# EAGLE board plugV11-to-pcbway-3 (EAGLE 7.5.0)
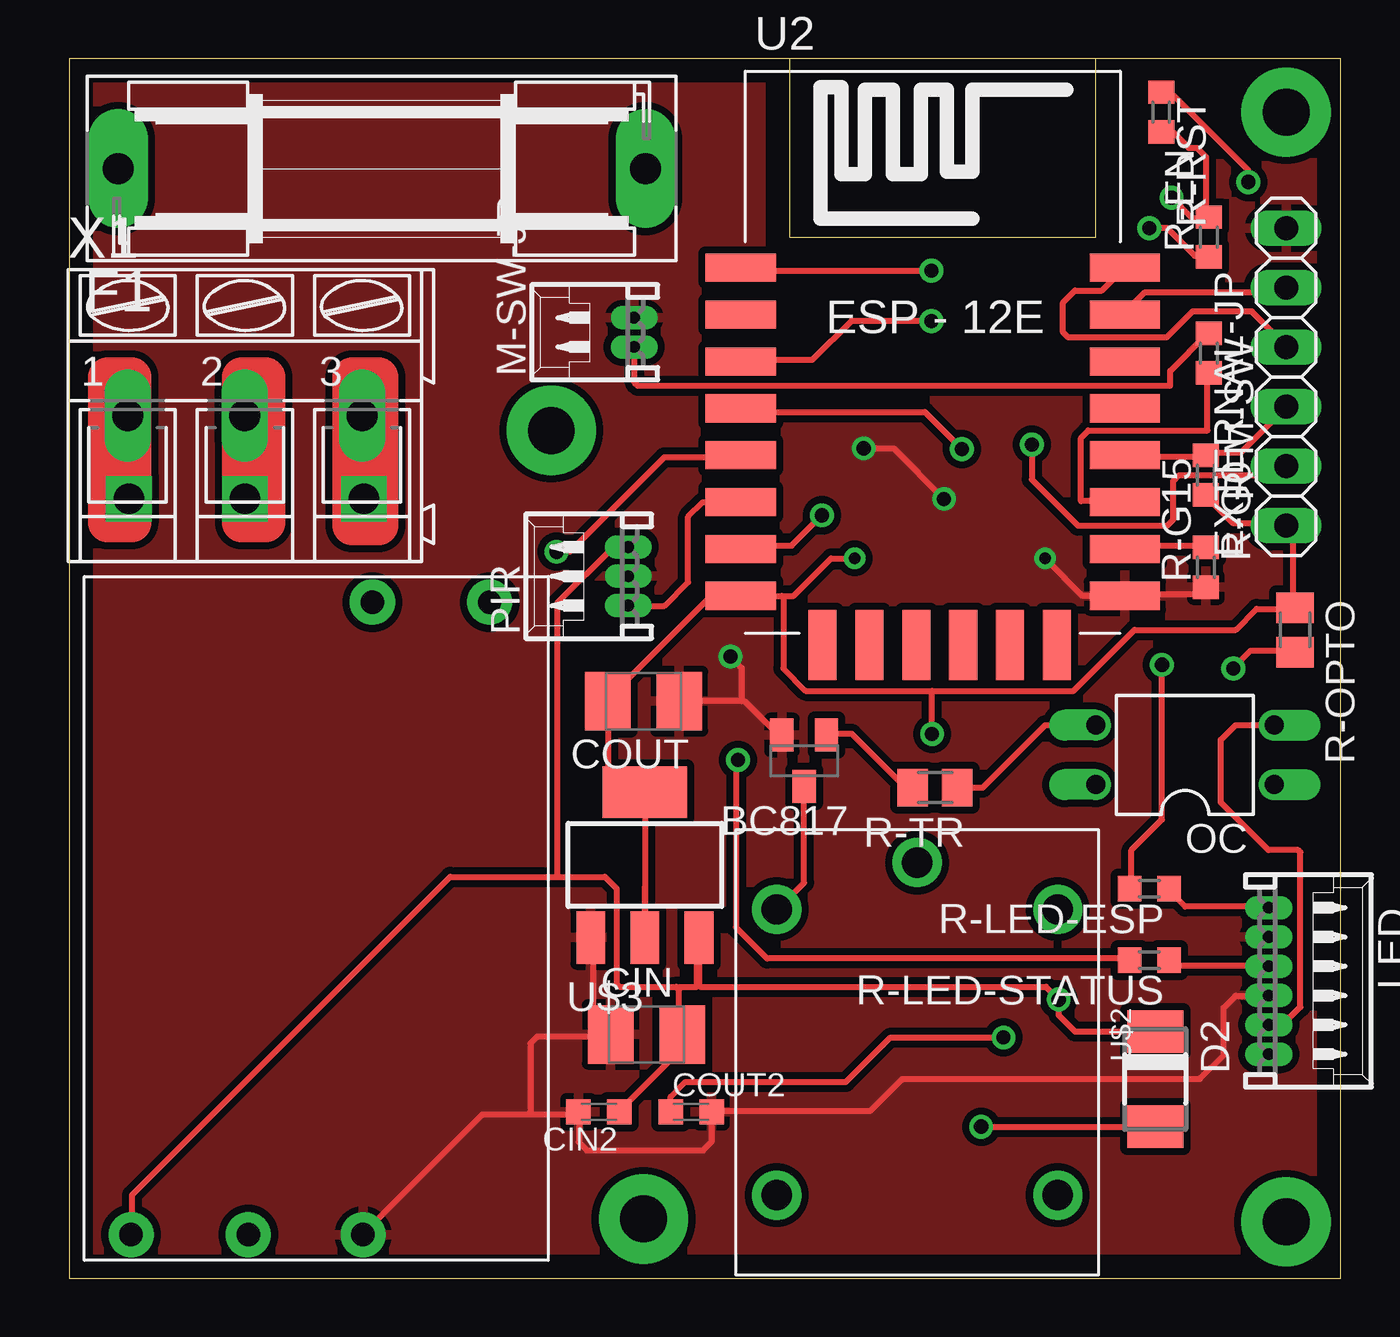
[diagram p0: board, top side]
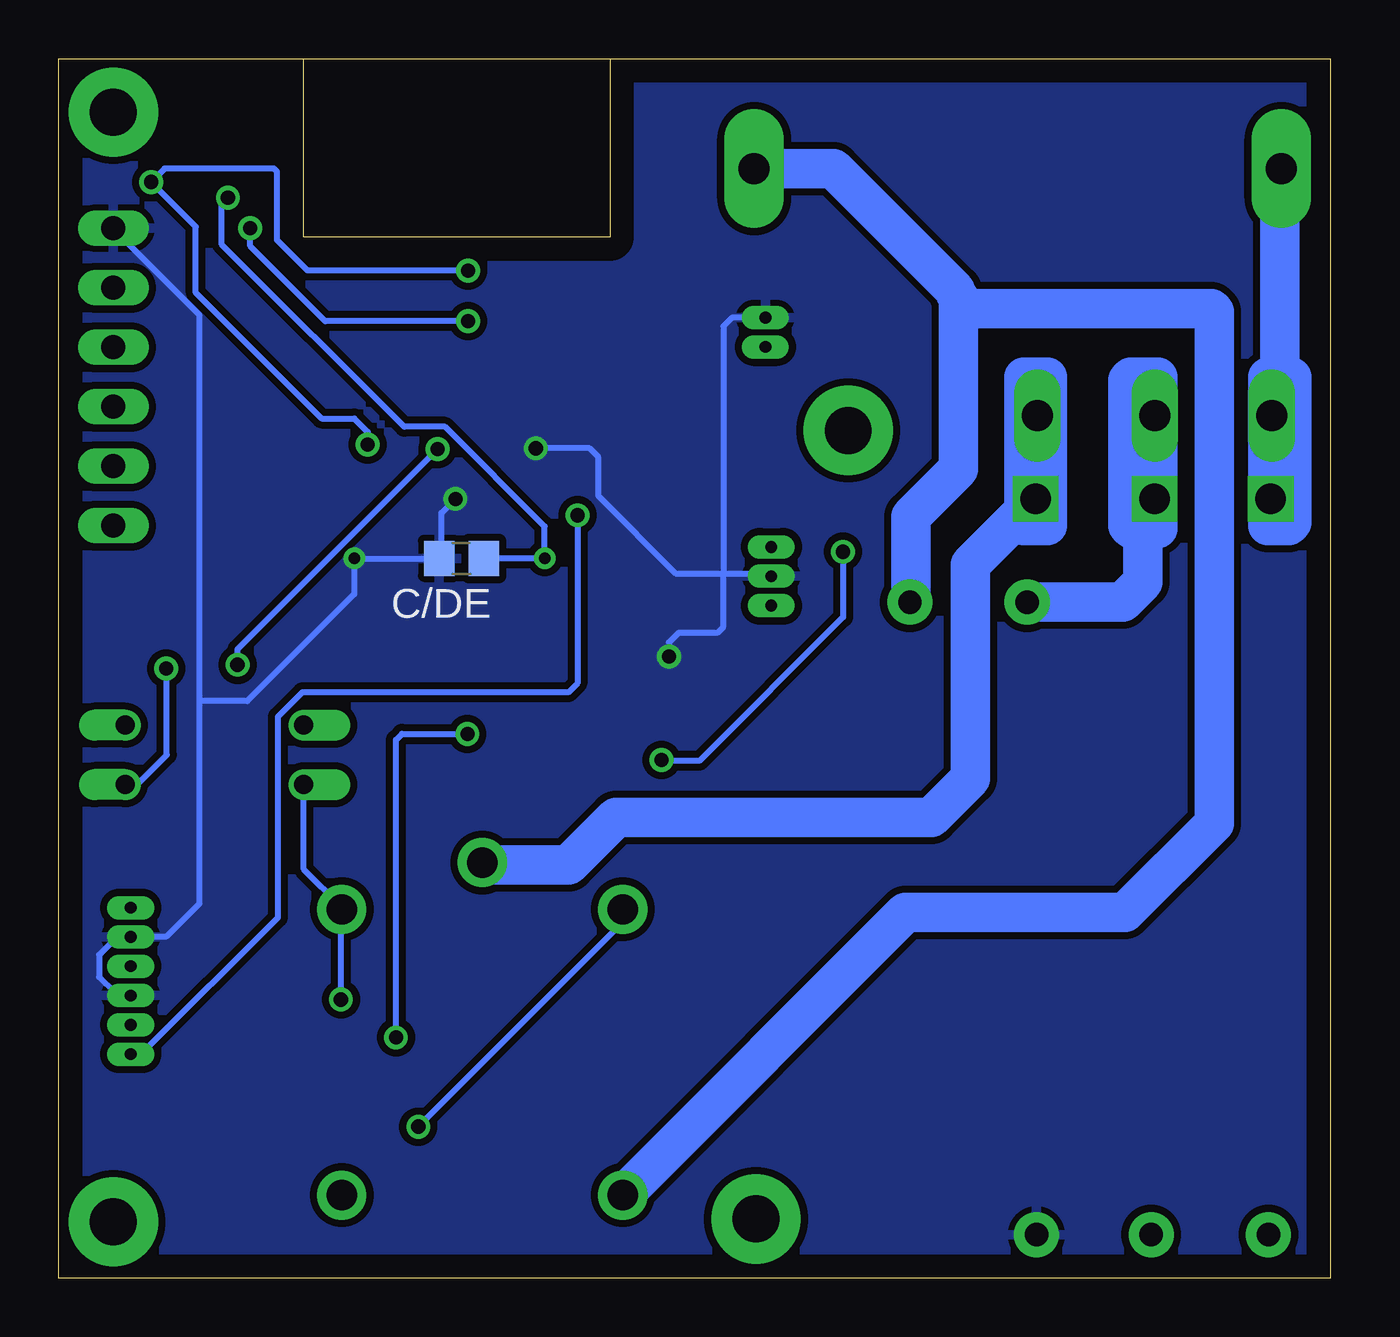
[diagram p1: board, bottom side, seen from below]

Size 54.28 x 52.07 mm. Coordinates in mm from the lower left corner, seen from the top.
Outline: 0,0 54.28,0 54.28,52.06 0,52.06 0,0
Outline: 30.73,52.07 30.73,44.45 43.81,44.45 43.81,52.07 30.73,52.07
Copper layers (1*16): Top 0.035mm / dielectric 1.5mm / Bottom 0.035mm
Design rules "default": minimum track width 10mil, minimum drill 24mil, track to track 8mil, track to pad 8mil, pad to pad 8mil, via to via 8mil, smd to smd 8mil, copper to edge 40mil, drill to drill 8mil, minimum pad ring 10mil, minimum via ring 8mil, stop-mask expansion 4mil, vias tented up to drill 0mil, thermal gap 10mil

## Footprints (pad centres in the part's own frame; a part is rotated, then mirrored left to right if it is on the bottom)
SOT23-BEC = smd 1 x 1.4: B -0.95,-1.1; C 0,1.1; E 0.95,-1.1
C0805 = smd 1.3 x 1.5: 1 -0.95,0; 2 0.95,0
B/3528-21R = smd 1.95 x 2.5: + 1.525,0; - -1.525,0
C0603K = smd 1.05 x 1.08: 1 -0.875,0; 2 0.875,0
DO-214AC = smd 1.8 x 2.4: A 2.025,0; C -2.025,0
1X06 = drill 1.016 long: 1 -6.35,0; 2 -3.81,0; 3 -1.27,0; 4 1.27,0; 5 3.81,0; 6 6.35,0
SH22,5 = drill 1.321 pad 2.54 long: 1 -11.252,0; 2 11.252,0
53048-06 = drill 0.5 pad 0.698 long: 1 3.125,-1.25; 2 1.875,-1.25; 3 0.625,-1.25; 4 -0.625,-1.25; 5 -1.875,-1.25; 6 -3.125,-1.25
53048-02 = drill 0.5 pad 0.698 long: 1 0.625,-1.25; 2 -0.625,-1.25
DIL04 = drill 0.813 offset: 1 -1.27,-3.81; 2 1.27,-3.81; 3 1.27,3.81; 4 -1.27,3.81
53048-03 = drill 0.5 pad 0.698 long: 1 1.25,-1.25; 2 0,-1.25; 3 -1.25,-1.25
R0603 = smd 1 x 1.1: 1 -0.85,0; 2 0.85,0
M0805 = smd 1.3 x 1.6: 1 -0.95,0; 2 0.95,0
ESP12E-SMD = smd 3 x 1.2: ADC -8.3,3.8; CH_PD -8.3,1.8; GND 8.1,-8.2; GPIO0 8.1,-2.2; GPIO2 8.1,-4.2; GPIO4 8.1,-0.2; GPIO5 8.1,1.8; GPIO12 -8.3,-4.2; GPIO13 -8.3,-6.2; GPIO14 -8.3,-2.2; GPIO15 8.1,-6.2; GPIO16 -8.3,-0.2; RESET -8.3,5.8; RXD0 8.1,3.8; TXD0 8.1,5.8; VCC -8.3,-8.2 | smd 1.2 x 3: CS0 -4.8,-10.3; GPIO9 -0.8,-10.3; GPIO10 1.2,-10.3; MISO -2.8,-10.3; MOSI 3.2,-10.3; SCLK 5.2,-10.3
RELAY-SONGLE = drill 1.3 pad 2.1: COM -8.1,0; NC 6.1,6; NO 6.1,-6; V+ -6.1,6; V- -6.1,-6
SOT-223 = smd 1.219 x 2.235: 1 -2.381,-3.099; 2 -0.07,-3.099; 3 2.241,-3.099 | smd 3.6 x 2.2: 4 -0.07,3.099
POWERSUPPLY-5V-700MA = drill 1 pad 1.93: 5V 13.5,-7.9; AC1 -13.5,7.4; AC2 -13.5,2.4; GND 13.5,2; NONE 13.5,-2.9
AK300/3 = drill 1.321 long: 1 -5.004,0; 2 0,0; 3 5.004,0

## Placement (x,y rotation side)
BC817  [SOT23-BEC]  31.37,22.1 180 top
C/DE  0.1uF  [C0805]  37.08,30.73 180 bottom
CIN  22uF/Tan  [B/3528-21R]  24.64,10.41 0 top
CIN2  0.1uF/ce  [C0603K]  22.61,7.11 180 top
COUT  22uF/Tan  [B/3528-21R]  24.51,24.64 180 top
COUT2  0.1uF/ce  [C0603K]  26.54,7.11 0 top
D2  [DO-214AC]  46.35,8.51 270 top
EXTERNAL-JP  Programming  [1X06]  51.94,38.48 90 top
F1  FUSESH22,5  [SH22,5]  13.34,47.37 0 top
LED  53048-06  [53048-06]  52.45,12.7 270 top
M-SW-JP  53048-02  [53048-02]  22.86,40.39 90 top
OC  PC817  [DIL04]  47.62,22.35 90 top
PIR  53048-03  [53048-03]  22.61,29.97 90 top
R-EN  10k  [R0603]  48.64,44.45 90 top
R-G0  10k  [R0603]  48.51,34.29 270 top
R-G15  1k  [R0603]  48.51,30.35 90 top
R-LED-ESP  470  [R0603]  46.1,16.64 180 top
R-LED-STATUS  470  [R0603]  46.1,13.59 180 top
R-M-SW  470  [R0603]  48.64,39.5 270 top
R-OPTO  1k  [M0805]  52.32,27.69 270 top
R-RST  10k  [R0603]  46.61,49.78 270 top
R-TR  510  [M0805]  36.96,20.95 180 top
U2  [ESP12E-SMD]  36.96,37.34 0 top
U$2  RELAY-SONGLE  [RELAY-SONGLE]  36.2,9.65 270 top
U$3  AMS1117-3.3  [SOT-223]  24.64,17.65 0 top
U$4  POWERSUPPLY-5V-700MA  [POWERSUPPLY-5V-700MA]  10.54,15.37 270 top
X1  [AK300/3]  7.49,36.83 0 top

## Library data of the parts
BC817 = transistor-neu-to92
C/DE CIN CIN2 COUT COUT2 R-EN R-G0 R-G15 R-LED-ESP R-LED-STATUS R-M-SW R-OPTO R-RST R-TR = rcl
D2 = diode
EXTERNAL-JP = pinhead
F1 = fuse; OC_FARNELL: unknown; OC_NEWARK: unknown
LED = con-molex; MF: WALDOM/MOLEX; MPN: 53048-0610; OC_FARNELL: 1012260; OC_NEWARK: 38C9911
M-SW-JP = con-molex; MF: MOLEX; MPN: 53048-0210; OC_FARNELL: 1012259; OC_NEWARK: 57H4718
OC = optocoupler; MPN: PC817X4J000F; OC_FARNELL: 9707727; OC_NEWARK: 97K7059
PIR = con-molex; MF: WALDOM/MOLEX; MPN: 53048-0310; OC_FARNELL: 9732918; OC_NEWARK: 38C9908
U2 = esp8266modules
U$2 = Seeed-OPL-Relay
U$3 = AMS1117-3.3
U$4 = PowerSupply-5V-700mA
X1 = con-ptr500; OC_FARNELL: unknown; OC_NEWARK: unknown

## Nets
3V3: C/DE.1 COUT2.1 COUT.+ EXTERNAL-JP.1 R-EN.2 R-G0.2 R-OPTO.1 R-RST.2 U2.VCC U$3.2 U$3.4
+5V: CIN2.1 CIN.+ D2.C OC.4 PIR.1 U$2.V+ U$3.3 U$4.5V
COM: U$2.COM X1.3
EN: R-EN.1 U2.CH_PD
G-00: EXTERNAL-JP.3 R-G0.1 U2.GPIO0
G-12: PIR.3 U2.GPIO12
G-13: LED.1 U2.GPIO13
G-15: R-G15.2 U2.GPIO15
GND: BC817.E C/DE.2 CIN2.2 CIN.- COUT2.2 COUT.- EXTERNAL-JP.6 LED.3 LED.5 M-SW-JP.1 PIR.2 R-G15.1 U2.GND U$3.1 U$4.GND
LED-ESP+: LED.6 R-LED-ESP.1
LED-RELAY+: LED.2 OC.2
LED-STATUS+: LED.4 R-LED-STATUS.1
LINE: F1.1 X1.1
M-SW+: M-SW-JP.2 R-M-SW.1
N: U$4.AC2 X1.2
N$1: OC.3 R-TR.1
N$2: BC817.B R-TR.2
N$4: R-LED-ESP.2 U2.GPIO16
N$7: R-M-SW.2 U2.GPIO2
N$8: R-LED-STATUS.2 U2.GPIO14
N$13: OC.1 R-OPTO.2
N$18: BC817.C D2.A U$2.V-
RELAY-NO: F1.2 U$2.NO U$4.AC1
RST: EXTERNAL-JP.2 R-RST.1 U2.RESET
RX: EXTERNAL-JP.5 U2.RXD0
TX: EXTERNAL-JP.4 U2.TXD0

## Tracks (layer width: path | path; a pad name or v marks a point on that pad's centre or on a via)
3V3  (via drill 0.5, 0.6, 0.61)
  Top 0.254: 30.41,29.14 U2.VCC 28.57,29.05 27.3,29.05 23.02,24.77 COUT.+ 23.02,24.61 23.02,20.8 24.45,20.8 U$3.4 24.61,20.64 24.61,14.61 U$3.2 24.57,16.69 | R-G0.2 48.58,33.34 49.69,32.23 51.91,32.23 EXTERNAL-JP.1 52.07,32.07 52.23,32.07 52.23,28.73 R-OPTO.1 | 48.58,45.4 R-EN.2 | R-RST.2 47.15,48.9 47.78,48.26 48.13,48.26 48.51,47.88 48.51,45.43 R-EN.2 | R-EN.2 48.58,45.24 47.94,45.24 v47.05,46.13 | 36.83,25.08 31.43,25.08 30.48,26.04 30.48,29.05 30.41,29.14 | 36.83,25.08 42.86,25.08 45.47,27.69 49.78,27.69 50.67,28.57 52.26,28.57 R-OPTO.1 | 52.23,28.57 R-OPTO.1 | 30.41,29.14 30.92,29.14 32.51,30.73 v33.53,30.73 | COUT2.1 25.67,7.76 26.29,8.38 33.15,8.38 35.05,10.29 v39.88,10.29 | v36.83,23.24 36.83,25.08
  Bottom 0.254: C/DE.1 v33.53,30.73 33.53,32.1 37.78,36.35 39.53,36.35 47.31,44.13 47.31,45.88 v47.05,46.13 | v39.88,10.29 39.88,22.99 39.62,23.24 v36.83,23.24
+5V  (via drill 0.61)
  Top 0.254: CIN2.1 23.5,7.14 26.04,9.68 26.04,10.32 CIN.+ 26.04,10.48 26.04,12.32 25.91,12.45 | 26.83,14.45 U$3.3 | 46.35,10.64 D2.C 46.35,10.54 42.93,10.54 42.23,11.24 v42.23,11.91 41.69,12.45 26.92,12.45 26.88,12.49 U$3.3 | 20.83,17.14 16.26,17.14 2.67,3.56 2.67,1.89 U$4.5V | 20.83,17.14 22.86,17.14 23.37,16.64 23.37,12.57 23.5,12.45 25.91,12.45 | 25.91,12.45 26.8,12.45 26.8,14.47 U$3.3 | PIR.1 23.22,31.22 20.83,28.83 20.83,17.14
  Bottom 0.254: OC.4 43.81,17.46 42.23,15.88 U$2.V+ 42.23,15.72 v42.23,11.91
COM  (via drill 1.3)
  Bottom 1.676: X1.3 12.5,38.43 12.45,38.48 | 12.45,38.48 12.32,38.48 | 12.32,38.48 12.06,38.48 12.06,32.13 13.08,32.13 13.08,38.48 12.45,38.48 | 12.32,38.48 12.32,33.53 v12.57,33.27 15.37,30.48 15.37,21.34 17.02,19.68 30.48,19.68 32.51,17.65 36.1,17.65 U$2.COM
EN  (via drill 0.61)
  Top 0.254: R-EN.1 48.58,43.66 48.04,43.66 46.86,44.83 v46.1,44.83 | U2.CH_PD 28.73,39.21 31.72,39.21 33.4,40.89 36.77,40.89 v36.8,40.86
  Bottom 0.254: v36.8,40.86 42.89,40.86 46.1,44.07 v46.1,44.83
G-00
  Top 0.254: U2.GPIO0 45.09,35.08 48.42,35.08 R-G0.1 48.58,35.24 50.01,35.24 51.91,37.15 EXTERNAL-JP.3
G-12
  Top 0.254: 28.57,33.02 U2.GPIO12 27.04,33.14 26.42,32.51 26.42,29.72 25.4,28.7 23.88,28.7 PIR.3
G-13  (via drill 0.61)
  Top 0.254: U2.GPIO13 28.73,31.27 30.83,31.27 v32.13,32.58
  Bottom 0.254: LED.1 51.12,9.68 50.64,9.68 44.93,15.4 44.93,23.97 43.88,25.02 32.51,25.02 32.13,25.4 v32.13,32.58
G-15
  Top 0.254: R-G15.2 48.42,31.27 45.09,31.27 U2.GPIO15
GND  (via drill 0.5, 0.6, 0.61)
  Top 0.254: 22.38,10.32 23.02,10.32 CIN.- 22.38,10.32 | 21.75,7.14 CIN2.2 | 27.3,6.99 COUT2.2 | CIN2.2 21.75,6.99 21.75,5.81 22.1,5.46 27.05,5.46 27.43,5.84 27.43,7.1 COUT2.2 | 22.38,10.32 22.38,14.45 U$3.1 | 19.56,6.99 21.59,6.99 CIN2.2 | 19.56,6.99 17.62,6.99 12.54,1.91 U$4.GND | 26.19,24.61 COUT.- | R-G15.1 48.42,29.37 48.26,29.21 45.09,29.21 U2.GND 43.25,29.14 v41.66,30.73 | COUT.- 26.19,24.77 26.45,24.77 | COUT2.2 27.46,7.14 34.2,7.14 35.56,8.51 48.26,8.51 49.28,9.53 49.28,11.56 49.78,12.06 51.12,12.06 LED.3 | BC817.E 30.27,23.2 28.83,24.64 28.7,24.64 | 28.7,24.64 COUT.- | 22.38,10.32 19.97,10.32 19.68,10.03 19.68,7.11 19.56,6.99 | v33.91,35.43 35.18,35.43 v37.34,33.27 | v28.23,26.54 28.7,26.07 28.7,24.64
  Bottom 0.254: 51.91,14.45 51.92,14.43 | 51.92,14.43 52.55,13.81 52.55,12.86 51.91,12.22 51.28,12.22 LED.3 | 25.91,30.1 23.97,30.1 PIR.2 | 48.26,24.64 48.26,16 49.66,14.61 51.17,14.61 LED.5 51.21,14.4 51.89,14.4 51.92,14.43 | 48.26,24.64 48.26,41.12 51.91,44.77 EXTERNAL-JP.6 | v37.34,33.27 37.94,32.67 37.94,30.64 C/DE.2 v41.66,30.73 41.66,29.21 46.23,24.64 48.26,24.64 | 25.91,30.1 27.94,30.1 31.24,33.4 31.24,35.05 31.62,35.43 v33.91,35.43 33.53,35.43 | 25.91,30.1 25.91,27.81 26.16,27.56 27.81,27.56 28.23,27.15 v28.23,26.54 | M-SW-JP.1 25.54,41.01 25.91,40.64 25.91,30.1
  pour Top (isolate 0.305): 0,0 54.23,0 54.23,52.07 0,52.07
  pour Bottom (isolate 0.305): 0,0 54.23,0 54.23,52.07 43.81,52.07 43.81,44.45 30.73,44.45 30.73,51.94 0,51.94
LED-ESP+
  Top 0.254: R-LED-ESP.1 46.99,16.51 47.62,15.88 51.12,15.88 LED.6
LED-RELAY+
  Top 0.254: LED.2 51.28,10.95 51.44,11.11 52.07,11.11 52.55,11.59 52.55,18.19 52.45,18.29 51.18,18.29 49.15,20.32 49.15,22.99 49.78,23.62 OC.2
LED-STATUS+
  Top 0.254: R-LED-STATUS.1 46.99,13.49 47.15,13.34 51.12,13.34 LED.4
LINE
  Bottom 1.676: X1.1 2.67,36.83 | 2.67,36.83 2.67,35.56 | 2.67,35.56 2.67,32.13 1.78,32.13 1.65,32.26 1.65,38.48 2.67,38.48 2.67,36.83 | 2.67,35.56 2.03,35.56 2.16,35.69 2.16,45.72 2.08,45.8 F1.1
M-SW+
  Top 0.254: R-M-SW.1 48.58,40.32 46.99,38.73 46.99,38.1 24.26,38.1 24.13,38.23 24.13,39.74 M-SW-JP.2 24.13,39.69
N
  Top 1.676: X1.2 7.37,36.83 | 7.37,36.83 7.37,38.48 8,38.48 | 8,38.48 8.38,38.48 8.38,32.26 8,32.26 | 8,32.26 7.37,32.26 7.37,36.83 | 8,38.48 8,32.26
  Bottom 1.676: X1.2 7.37,36.83 | 7.37,36.83 7.37,36.96 | 7.37,36.96 7.37,38.48 8.51,38.48 8.64,38.35 8.64,32.13 8.51,32 7.37,32 7.37,36.83 | 7.37,36.96 8.13,36.96 8,36.83 8,29.72 8.85,28.87 U$4.AC2
N$1
  Top 0.254: R-TR.1 38.99,20.95 41.66,23.62 OC.3
N$2
  Top 0.254: R-TR.2 35.69,20.95 33.4,23.24 32.36,23.24 BC817.B
N$3  (via drill 2 pad 3.81)
  other vias: 20.57,36.2
N$4  (via drill 0.61)
  Top 0.254: v38.1,35.4 36.51,36.99 28.73,36.99 U2.GPIO16 | R-LED-ESP.2 45.4,16.67 45.34,16.73 45.34,18.29 46.64,19.59 v46.64,26.19
  Bottom 0.254: v38.1,35.4 46.64,26.86 v46.64,26.19
N$5  (via drill 2 pad 3.81)
  other vias: 24.51,2.54
N$6  (via drill 2 pad 3.81)
  other vias: 51.94,2.41
N$7
  Top 0.254: R-M-SW.2 48.58,38.58 48.58,36.2 43.5,36.2 43.18,35.88 43.18,33.18 44.93,33.18 U2.GPIO2
N$8  (via drill 0.61)
  Top 0.254: R-LED-STATUS.2 45.24,13.65 29.78,13.65 28.45,14.99 28.45,22.04 v28.54,22.13 | 28.57,35.08 U2.GPIO14 28.57,35.05 25.4,35.05 21.37,31.02 v20.8,31.02
  Bottom 0.254: v20.8,31.02 20.8,28.23 26.92,22.1 28.51,22.1 v28.54,22.13
N$9  (via drill 2 pad 3.81)
  other vias: 51.94,49.78
N$10  (via drill 1.3)
  other vias: 7.49,33.27
N$12  (via drill 1.3)
  other vias: 2.54,33.27
N$13  (via drill 0.61)
  Top 0.254: 52.23,26.67 R-OPTO.2 52.26,26.8 50.42,26.8 49.69,26.07 v49.69,26.04
  Bottom 0.254: v49.69,26.04 49.66,26 49.66,22.35 50.9,21.11 51.44,21.11 OC.1 51.44,21.03
N$14
  Top 1.676: 2.41,38.48 2.67,38.48 2.67,32.26 1.65,32.26 1.65,38.48 2.41,38.48
N$15
  Top 1.676: 12.57,38.1 12.06,38.1 | 12.06,38.1 12.06,37.59 12.06,32.13 13.21,32.13 13.21,38.48 12.06,38.48 12.06,38.1
N$18  (via drill 0.61)
  Top 0.254: 46.35,6.51 D2.A v38.92,6.48 | U$2.V- 30.23,15.75 31.37,16.89 BC817.C
  Bottom 0.254: U$2.V- 30.32,15.72 30.32,15.08 v38.92,6.48
RELAY-NO
  Bottom 1.676: F1.2 21.21,47.37 16,42.16 16,42.04 15.88,41.91 15.88,41.4 | 15.88,41.4 15.88,34.54 17.91,32.51 17.91,28.9 U$4.AC1 | U$2.NO 18.13,15.62 8.76,15.62 4.95,19.43 4.95,41.27 5.08,41.4 15.88,41.4
RST  (via drill 0.61)
  Top 0.254: R-RST.1 47.15,50.48 50.32,47.31 v50.32,46.8 | 51.91,34.61 EXTERNAL-JP.2 51.56,34.29 47.37,34.29 47.12,34.04 47.12,32.38 46.86,32.13 43.05,32.13 41.08,34.1 v41.08,35.59 | U2.RESET 28.73,43.02 v36.8,43.02
  Bottom 0.254: v36.8,43.02 43.66,43.02 44.96,44.32 44.96,47.24 45.09,47.37 49.75,47.37 v50.32,46.8 48.42,44.9 48.42,42.07 43.05,36.7 41.66,36.7 41.08,36.13 v41.08,35.59
RX
  Top 0.254: U2.RXD0 45.09,41.27 45.88,42.07 51.75,42.07 51.91,42.23 EXTERNAL-JP.5
TX
  Top 0.254: 44.93,43.02 U2.TXD0 44.08,42.16 42.93,42.16 42.42,41.66 42.42,40.39 42.64,40.16 46.83,40.16 47.94,41.27 50.48,41.27 51.91,39.85 EXTERNAL-JP.4